# Altium PCB DBG-010.PcbDoc (part 1 of 2)
Units mil, origin at the board's own origin, x right, y up, seen from the top; angles counter-clockwise.
Board outline 2950 x 3200 mil, 4 copper layers (Top Layer, Layer 1, Layer 2, Bottom Layer), stack 61.811 mil thick; 92 components, 108 nets, 611 pads, 149 vias.
Unrouted connection lines stored in the file: 194.
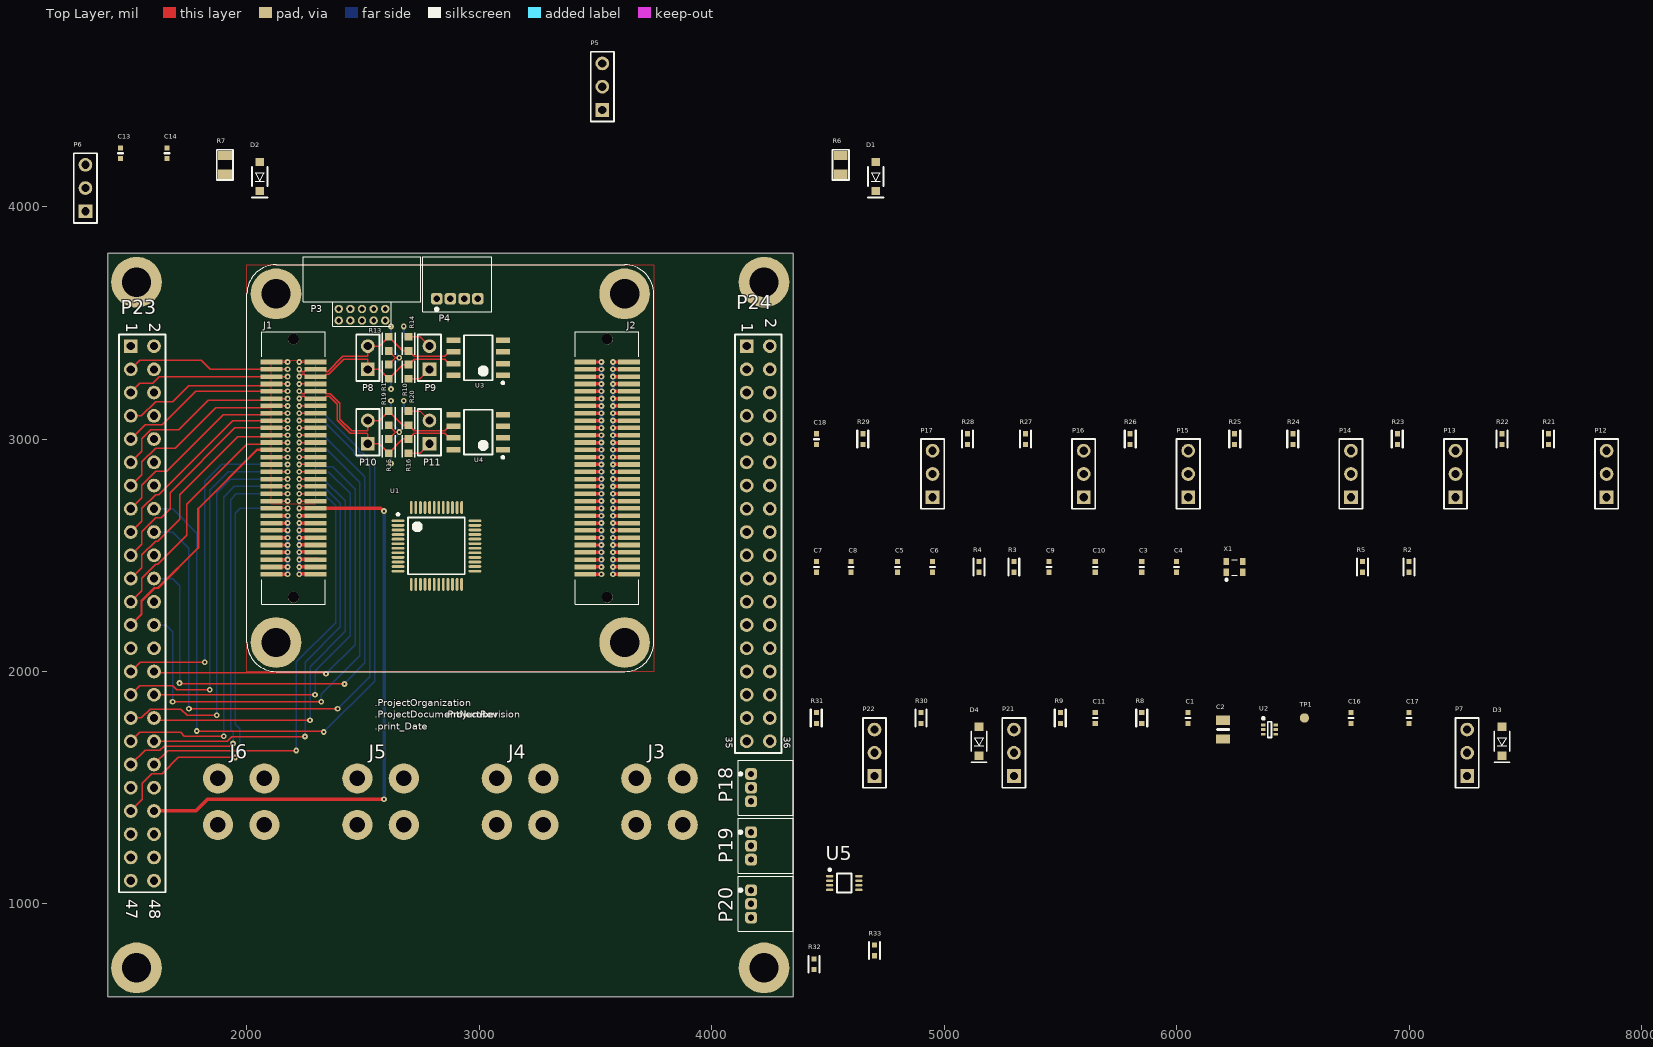
[diagram p0: Top Layer view]
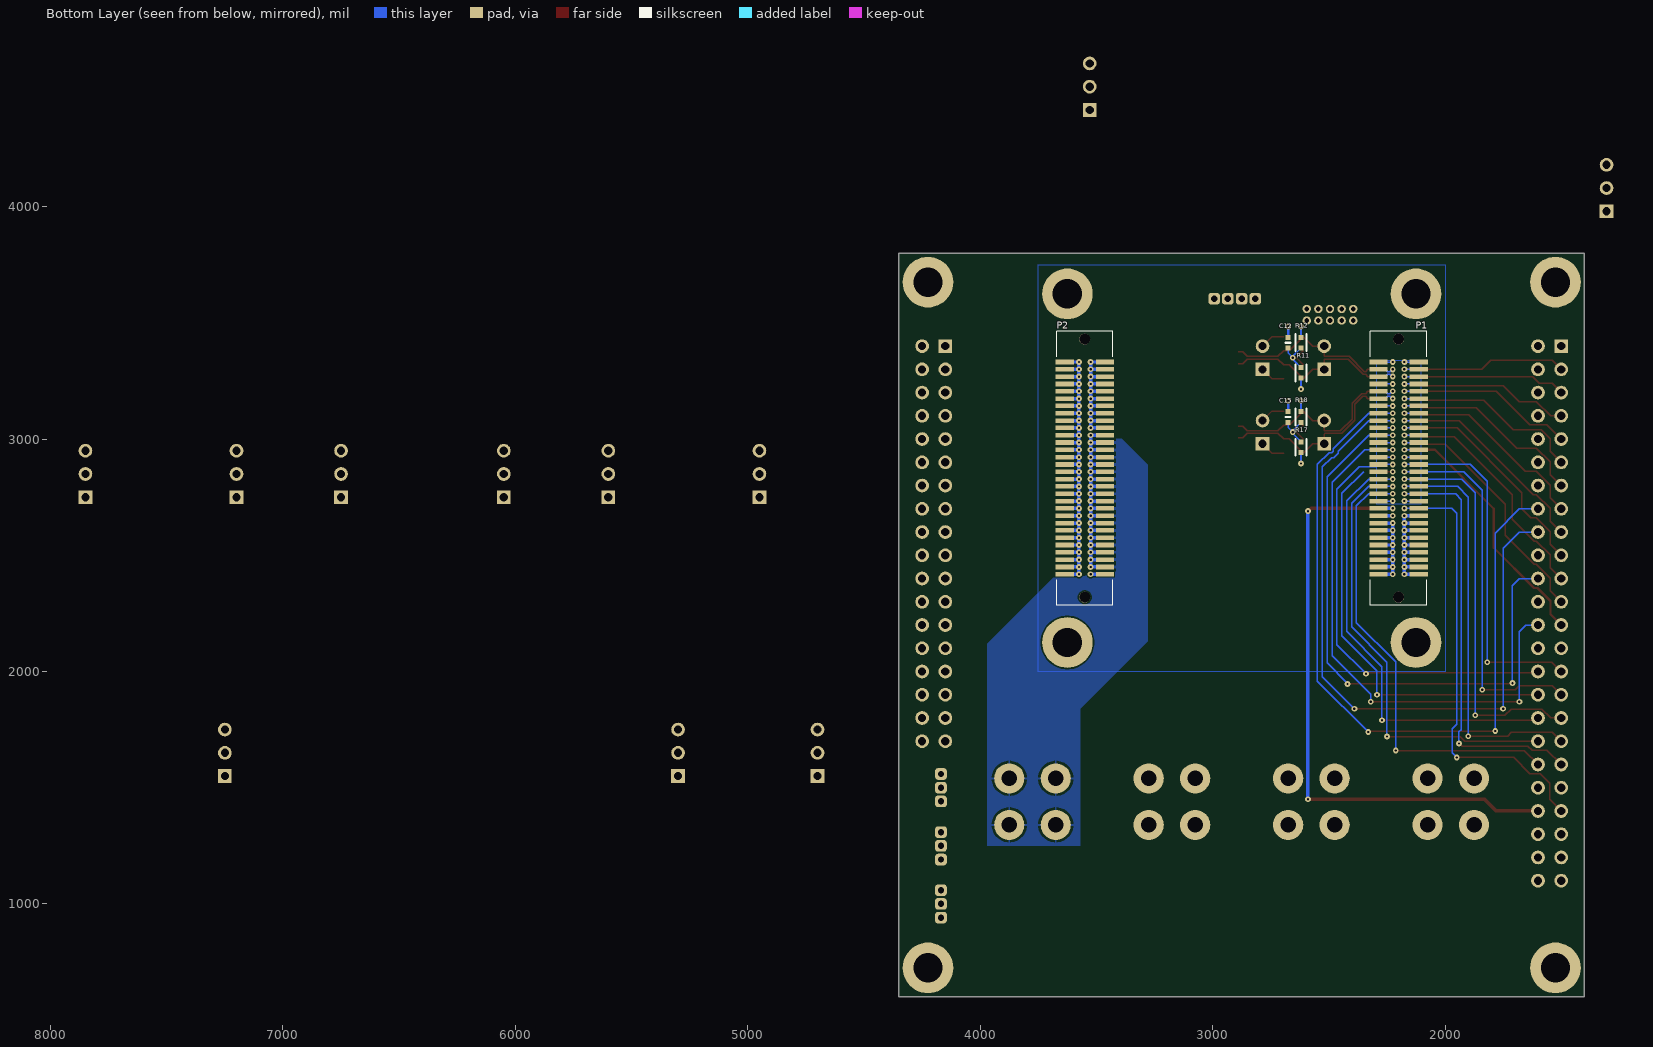
[diagram p1: Bottom Layer view, seen from below]
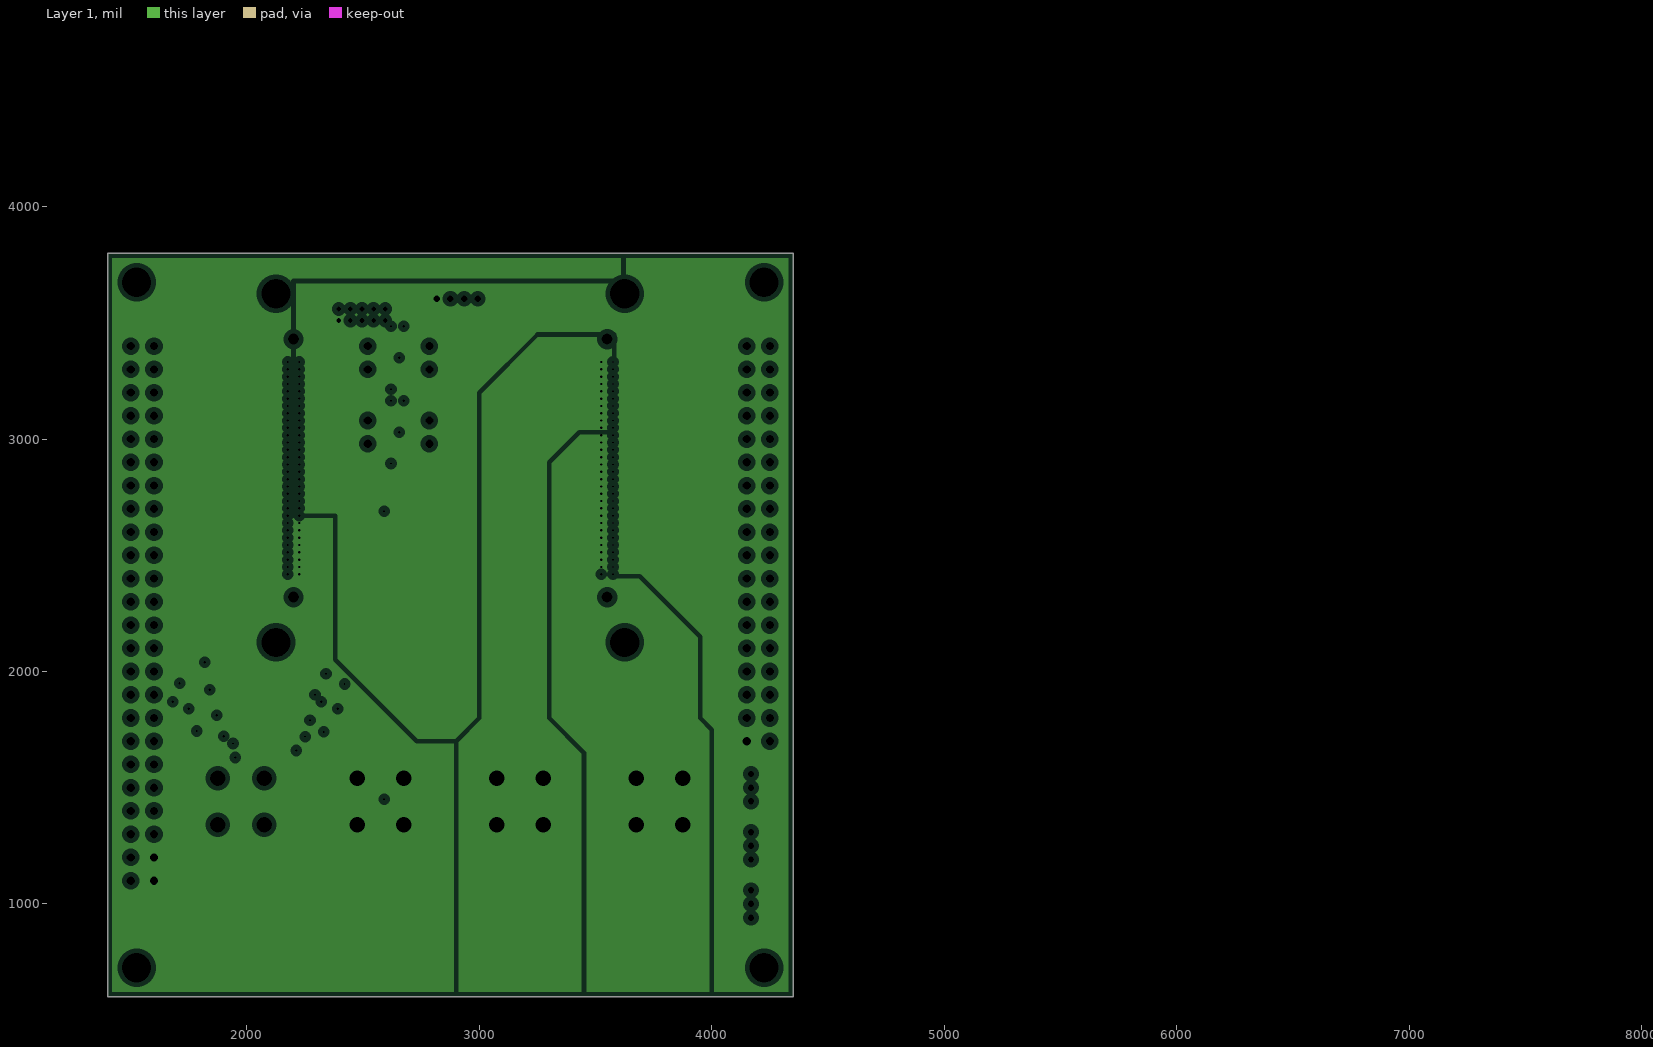
[diagram p2: Layer 1, clearances drawn from the general rule]
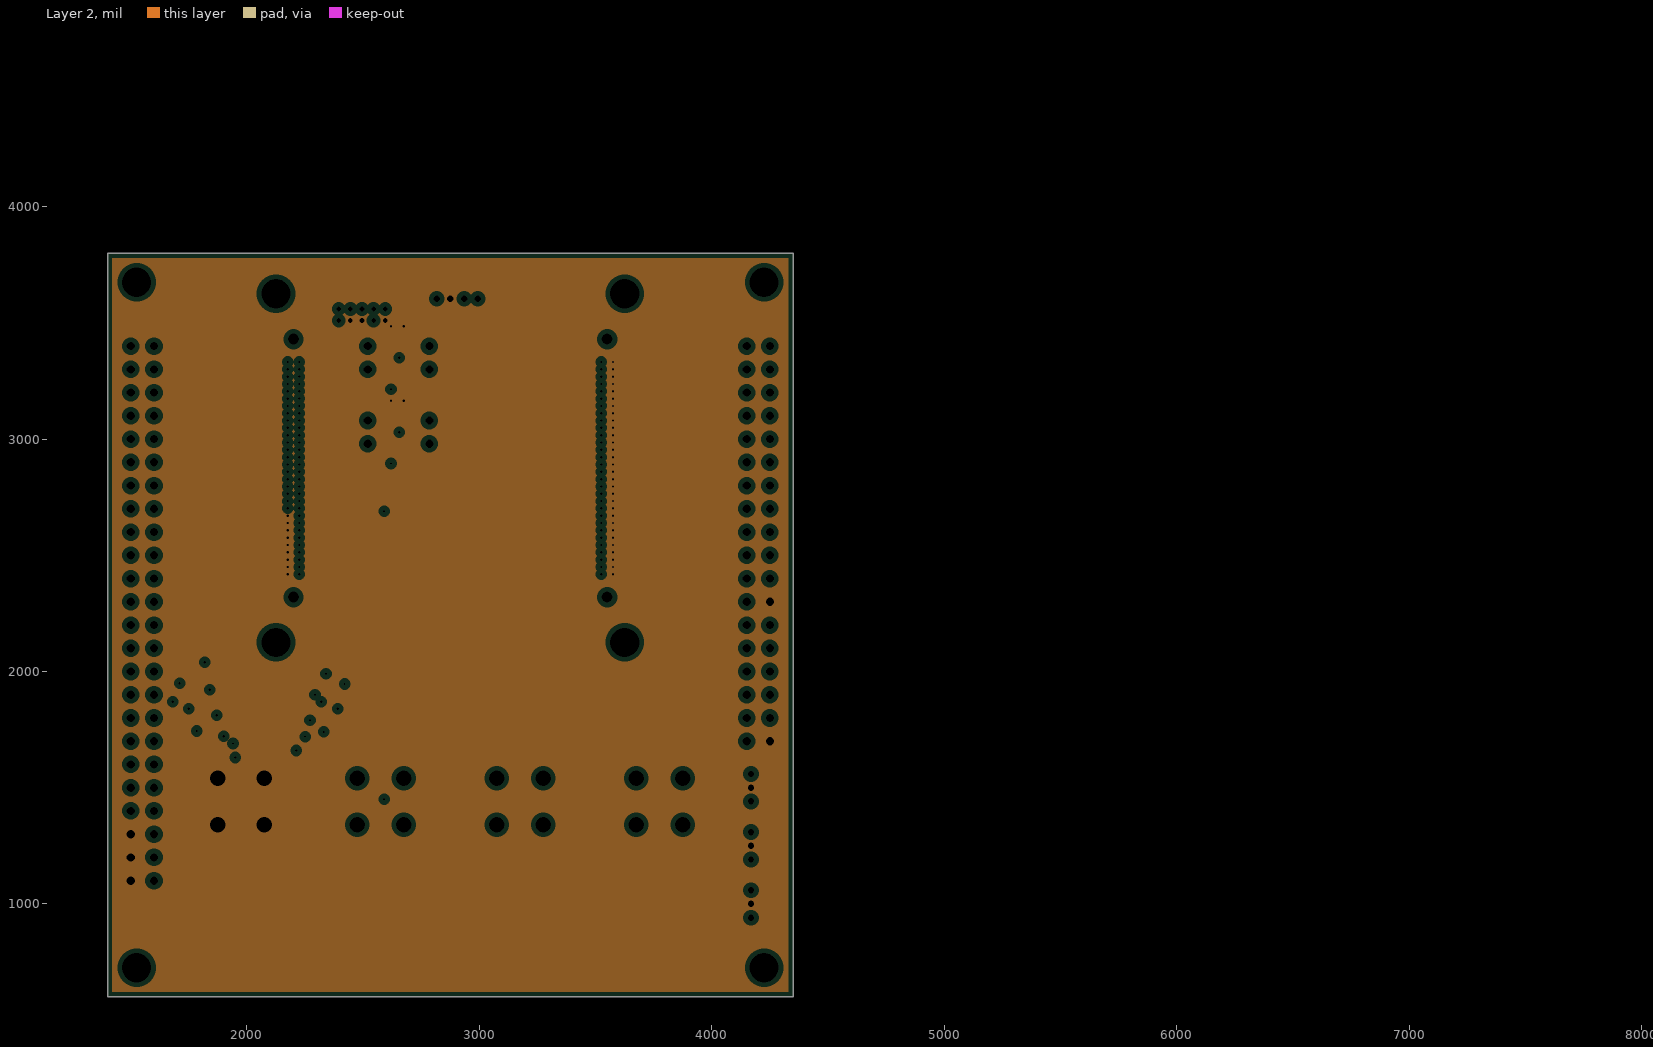
[diagram p3: Layer 2, clearances drawn from the general rule]

## Layer stack, top to bottom
Top Solder: solder mask 0.5, Solder Resist, Dk 3.5
Top Layer: signal copper 1.378
Dielectric 2: prepreg 3.937, PP-006, Dk 4.05
Layer 1: plane copper 0.689
Dielectric 1: core 49.803, FR-4, Dk 4.6
Layer 2: plane copper 0.689, net GND
Dielectric 3: prepreg 3.937, PP-006, Dk 4.05
Bottom Layer: signal copper 1.378
Bottom Solder: solder mask 0.5, Solder Resist, Dk 3.5

## Board outline
1400,600 1400,3800 4350,3800 4350,600

## Design rules (kind name [scope] priority, off if disabled: settings)
AssemblyTestPointUsage AssemblyTestPointUsage_1 [All] p2:
AssemblyTestpoint AssemblyTestpoint_1 [All] p2: testpointundercomponent=TRUE minsize=40 maxsize=100 preferedsize=60 minholesize=0 maxholesize=40 preferedholesize=32 testpointgrid=1 usegrid=TRUE gridtolerance=0.01 allowsidetop=TRUE allowsidebottom=TRUE
Clearance Clearance_1 [All] p1: gap=6 ignorepadtopadclearanceinfootprint=FALSE except(0: Arc-Hole Track-Hole SMDPad-Hole THPad-Hole Via-Hole Fill-Hole Poly-Hole Region-Hole Text-Hole)
DiffPairsRouting [InDifferentialPairClass('CAN')] p1: maxlimit=6 minlimit=6 mostfreqgap=6 toplayer_minwidth=5.5 toplayer_maxwidth=5.5 toplayer_prefwidth=5.5 bottomlayer_minwidth=5.5 bottomlayer_maxwidth=5.5 bottomlayer_prefwidth=5.5 impedanceprofiledriven=TRUE impedanceprofileid={7FDF8D7F-E7BA-4B06-BEF4-E7C1E6577216} impedanceprofilevalue=100.000000 maxuncoupledlength=600
FabricationTestPointUsage FabricationTestPointUsage_1 [All] p2: valid=0 allowmultiple=FALSE
FabricationTestpoint FabricationTestpoint_1 [All] p2: side=3 testpointundercomponent=TRUE minsize=40 maxsize=100 preferedsize=60 minholesize=0 maxholesize=40 preferedholesize=32 testpointgrid=1 allowsidetop=TRUE allowsidebottom=TRUE usegrid=TRUE gridtolerance=0.01
FanoutControl Fanout_LCC [IsLCC] p1: bgadir=Out bgaviamode=Centered fanoutstyle=Auto fanoutdirection=Alternating viagrid=1 // Fanout_LCC (Default Rule)
FanoutControl Fanout_BGA [IsBGA] p2: bgadir=Out bgaviamode=Centered fanoutstyle=Auto fanoutdirection=Alternating viagrid=1 // Fanout_BGA (Default Rule)
FanoutControl Fanout_Default [All] p4: bgadir=Out bgaviamode=Centered fanoutstyle=Auto fanoutdirection=Alternating viagrid=1 // Fanout_Default (Default Rule)
FanoutControl Fanout_Small [(CompPinCount < 5)] p5: bgadir=Out bgaviamode=Centered fanoutstyle=Auto fanoutdirection=OutThenIn viagrid=1 // Fanout_Small (Default Rule)
FanoutControl Fanout_BGA_1 [IsBGA] p6: bgadir=Out bgaviamode=Centered fanoutstyle=Auto fanoutdirection=Alternating viagrid=1 // Fanout_BGA (Default Rule)
FanoutControl Fanout_LCC_1 [IsLCC] p7: bgadir=Out bgaviamode=Centered fanoutstyle=Auto fanoutdirection=Alternating viagrid=1 // Fanout_LCC (Default Rule)
FanoutControl Fanout_SOIC_1 [IsSOIC] p8: bgadir=Out bgaviamode=Centered fanoutstyle=Auto fanoutdirection=Alternating viagrid=1 // Fanout_SOIC (Default Rule)
FanoutControl Fanout_Small_1 [(CompPinCount < 5)] p9: bgadir=Out bgaviamode=Centered fanoutstyle=Auto fanoutdirection=OutThenIn viagrid=1 // Fanout_Small (Default Rule)
FanoutControl Fanout_Default_1 [All] p10: bgadir=Out bgaviamode=Centered fanoutstyle=Auto fanoutdirection=Alternating viagrid=1 // Fanout_Default (Default Rule)
Height Height_Top [TouchesRoom('BoardHeight_Top') and OnTop and not ((Name='J1') or (Name='J2') or (Name='P1') or (Name='P2') )] p1: minheight=0 maxheight=625 prefheight=0
Height Height_Bottom [TouchesRoom('BoardHeight_Bottom') and OnBottom and not ((Name='J1') or (Name='J2') or (Name='P1') or (Name='P2') )] p2: minheight=0 maxheight=152 prefheight=0
HoleSize HoleSize_1 [All] p1: absolutevalues=TRUE maxlimit=130 minlimit=10 maxpercent=80.000 minpercent=20.000
PlaneClearance [All] p1: clearance=20
PlaneConnect [All] p1: pad.planeconnectstyle=Relief pad.reliefexpansion=20 pad.reliefentries=4 pad.reliefconductorwidth=10 pad.reliefairgap=10 via.planeconnectstyle=Direct via.reliefexpansion=20 via.reliefentries=4 via.reliefconductorwidth=10 via.reliefairgap=10
PolygonConnect [All] p1: connectstyle=Relief reliefconductorwidth=10 reliefentries=4 polygonreliefangle="90 Angle" airgapwidth=10
RoomDefinition BoardHeight_Top [False] p1: confinementstyle=ConfineIn formatcopy=TRUE lockcomponents=FALSE outline 3750,3750 2000,3750 2000,2000 3750,2000
RoomDefinition BoardHeight_Bottom [False] p2: confinementstyle=ConfineIn formatcopy=TRUE lockcomponents=FALSE outline 2000,3750 3750,3750 3750,2000 2000,2000
RoutingVias RoutingVias_1 [All] p1: holewidth=10 width=25 viastyle="Through Hole" minholewidth=10 minwidth=25 maxholewidth=28 maxwidth=50
ShortCircuit ShortCircuit_1 [All] p1: allowed=FALSE
SilkToBoardRegionClearance SilkToBoardRegionClearance_1 [All] p2:
SolderMaskExpansion [All] p1: expansion=4 istentingtop=FALSE
UnRoutedNet UnRoutedNet_1 [All] p1:
UnpouredPolygon UnpouredPolygon_1 [All] p1:
Width "Schematic Width Constraint_1" [InNet('NetR3_1')] p1: maxlimit=10 minlimit=10 preferedwidth=10
Width "Schematic Width Constraint" [InNet('XTAL')] p2: maxlimit=10 minlimit=10 preferedwidth=10
Width [All] p3: maxlimit=100 minlimit=5 preferedwidth=10 minimp=50.000000 maximp=50.000000 favimp=50.000000
18 further rules are at their usual default settings.

## Classes and differential pairs
differential pair class CAN: CAN0 CAN1
net class HIghVoltage: +VBAT +VBAT_Preboot
component class Sheet1: J6
differential pair CAN1: +CAN1_P -CAN1_N
differential pair CAN0: +CAN0_P -CAN0_N

## Components (designator, comment, footprint, x,y, rotation, side; value= is the part's Value field where it differs from the comment)
C1 "1µF" SMD-0402C 6050,1800 r0 top
C2 "4.7µF" SMD-0805C 6200,1750 r0 top
C3 "0.10µF" SMD-0402C 5850,2450 r0 top
C4 "0.10µF" SMD-0402C 6000,2450 r0 top
C5 "0.10µF" SMD-0402C 4800,2450 r0 top
C6 "10000pF" SMD-0402C 4950,2450 r0 top
C7 "1µF" SMD-0402C 4450,2450 r0 top
C8 "0.10µF" SMD-0402C 4600,2450 r0 top
C9 "0.10µF" SMD-0402C 5450,2450 r0 top
C10 "0.10µF" SMD-0402C 5650,2450 r0 top
C11 "0.10µF" SMD-0402C 5650,1800 r0 top
C12 "0.10µF" SMD-0402C 2675,3415 r0 bottom
C13 "0.10µF" SMD-0402C 1455,4230 r0 top
C14 "0.10µF" SMD-0402C 1655,4230 r0 top
C15 "0.10µF" SMD-0402C 2675,3095 r0 bottom
C16 "0.10µF" SMD-0402C 6750,1800 r0 top
C17 "0.10µF" SMD-0402C 7000,1800 r0 top
C18 "0.10µF" SMD-0402C 4450,3000 r0 top
D1 "SBR0560S1Q-7" SOD123 4705,4130 r90 top
D2 "SBR0560S1Q-7" SOD123 2055,4130 r90 top
D3 "1N4148WQ-7-F" SOD123 7400,1700 r90 top
D4 "1N4148WQ-7-F" SOD123 5150,1700 r90 top
J1 "10144517-064802LF" 10144517-064802LF 2200,2875 r90 top locked
J2 "10144517-064802LF" 10144517-064802LF 3550,2875 r90 top locked
J3 "CT3151SP-2" CT3151SP-2 3775,1440 r180 top
J4 "CT3151SP-2" CT3151SP-2 3175,1440 r180 top
J5 "CT3151SP-2" CT3151SP-2 2575,1440 r180 top
J6 "CT3151SP-0" CT3151SP-0 1975,1440 r180 top
P1 "10144518-064802LF" 10144518-064802LF 2200,2875 r270 bottom locked
P2 "10144518-064802LF" 10144518-064802LF 3550,2875 r270 bottom locked
P3 "2x5_0.05_SWD" 2x5_0.05_R 2495,3510 r180 top
P4 "S4B-ZR(LF)(SN)" S4B-ZR(LF)(SN) 2905,3785 r180 top
P5 "Header 3" HDR1X3 3528.9,4416.35 r90 top
P6 "Header 3" HDR1X3 1305,3980 r90 top
P7 "Header 3" HDR1X3 7250,1550 r90 top
P8 "Header 2" HDR1X2 2520,3300 r90 top
P9 "Header 2" HDR1X2 2785,3300 r90 top
P10 "Header 2" HDR1X2 2520,2980 r90 top
P11 "Header 2" HDR1X2 2785,2980 r90 top
P12 "Header 3" HDR1X3 7850,2750 r90 top
P13 "Header 3" HDR1X3 7200,2750 r90 top
P14 "Header 3" HDR1X3 6750,2750 r90 top
P15 "Header 3" HDR1X3 6050,2750 r90 top
P16 "Header 3" HDR1X3 5600,2750 r90 top
P17 "Header 3" HDR1X3 4950,2750 r90 top
P18 "S3B-ZR(LF)(SN)" S3B-ZR(LF)(SN) 4350,1500 r90 top
P19 "S3B-ZR(LF)(SN)" S3B-ZR(LF)(SN) 4350,1250 r90 top
P20 "S3B-ZR(LF)(SN)" S3B-ZR(LF)(SN) 4350,1000 r90 top
P21 "Header 3" HDR1X3 5300,1550 r90 top
P22 "Header 3" HDR1X3 4700,1550 r90 top
P23 "Header 24X2" HDR2X24 1500,3400 r270 top
P24 "Header 18X2" HDR2X18 4150,3400 r270 top
R1 "62" SMD-0603-RES 2610,3290 r0 top
R2 "1k" SMD-0402-RES 7000,2450 r0 top
R3 "22" SMD-0402-RES 5300,2450 r0 top
R4 "1k" SMD-0402-RES 5150,2450 r0 top
R5 "10k" SMD-0402-RES 6800,2450 r0 top
R6 "2.2" SMD-0805-RES 4555,4180 r0 top
R7 "2.2" SMD-0805-RES 1905,4180 r0 top
R8 "10k" SMD-0402-RES 5850,1800 r0 top
R9 "100k" SMD-0402-RES 5500,1800 r0 top
R10 "62" SMD-0603-RES 2695,3290 r180 top
R11 "1.5k" SMD-0402-RES 2620,3285 r180 bottom
R12 "1.5k" SMD-0402-RES 2620,3415 r180 bottom
R13 "62" SMD-0603-RES 2610,3410 r0 top
R14 "62" SMD-0603-RES 2695,3410 r180 top
R15 "62" SMD-0603-RES 2610,2970 r0 top
R16 "62" SMD-0603-RES 2695,2970 r180 top
R17 "1.5k" SMD-0402-RES 2620,2965 r180 bottom
R18 "1.5k" SMD-0402-RES 2620,3095 r180 bottom
R19 "62" SMD-0603-RES 2610,3090 r0 top
R20 "62" SMD-0603-RES 2695,3090 r180 top
R21 "1k" SMD-0402-RES 7600,3000 r0 top
R22 "100k" SMD-0402-RES 7400,3000 r0 top
R23 "100k" SMD-0402-RES 6950,3000 r0 top
R24 "1k" SMD-0402-RES 6500,3000 r0 top
R25 "100k" SMD-0402-RES 6250,3000 r0 top
R26 "100k" SMD-0402-RES 5800,3000 r0 top
R27 "1k" SMD-0402-RES 5350,3000 r0 top
R28 "100k" SMD-0402-RES 5100,3000 r0 top
R29 "100k" SMD-0402-RES 4650,3000 r0 top
R30 "100k" SMD-0402-RES 4900,1800 r0 top
R31 "1k" SMD-0402-RES 4450,1800 r0 top
R32 "220" SMD-0402-RES 4440,740 r0 top
R33 "1k" SMD-0402-RES 4700,800 r0 top
TP1 "TP" TP_SMD_40 6550,1800 r90 top
U1 "ATSAMC21G" TSQFP50P900X900X120-48N 2815.35,2540.16 r0 top
U2 "NCV8170AXV330T2G" SOTFL50P160X60-6N 6400,1750 r0 top
U3 "ATA6561-GAQW" SOIC127P600X175-8N 2995,3350 r180 top
U4 "ATA6561-GAQW" SOIC127P600X175-8N 2995,3030 r180 top
U5 "74HC3G14DC-Q100H" "TSSOP50P310X100-8N (74HC3G14DC-Q100H)" 4570,1090 r0 top
X1 "MC2016K30.0000C16ESH" MC2016 6250,2450 r0 top

## Footprints (in the part's own frame and the unit in brackets; to place one, negate y for a bottom-side part, rotate by r counter-clockwise, add the part's x,y. Pads: shape width x height; smd on the part's side, far side on the other; paste and mask are expansions set on the pad)
2x5_0.05_R [mil]
  round 36 hole 20: 1(100,0) 2(100,-50) 3(50,0) 4(50,-50) 5(0,0) 6(0,-50) 8(-50,-50) 9(-100,0) 10(-100,-50)
  round 36 hole 20 mask+4: 7(-50,0)
  silkscreen extent -253,-274 253,25, body extent -250,-274 250,8, height 198
10144517-064802LF [mm]
  rect 0.5x2.4 smd: 1(11.6,2.4) 2(11.6,-2.4) 3(10.8,2.4) 4(10.8,-2.4) 5(10,2.4) 6(10,-2.4) 7(9.2,2.4) 8(9.2,-2.4) 9(8.4,2.4) 10(8.4,-2.4) 11(7.6,2.4) 12(7.6,-2.4) 13(6.8,2.4) 14(6.8,-2.4) 15(6,2.4) 16(6,-2.4) 17(5.2,2.4) 18(5.2,-2.4) 19(4.4,2.4) 20(4.4,-2.4) 21(3.6,2.4) 22(3.6,-2.4) 23(2.8,2.4) 24(2.8,-2.4) 25(2,2.4) 26(2,-2.4) 27(1.2,2.4) 28(1.2,-2.4) 29(0.4,2.4) 30(0.4,-2.4) 31(-0.4,2.4) 32(-0.4,-2.4) 33(-1.2,2.4) 34(-1.2,-2.4) 35(-2,2.4) 36(-2,-2.4) 37(-2.8,2.4) 38(-2.8,-2.4) 39(-3.6,2.4) 40(-3.6,-2.4) 41(-4.4,2.4) 42(-4.4,-2.4) 43(-5.2,2.4) 44(-5.2,-2.4) 45(-6,2.4) 46(-6,-2.4) 47(-6.8,2.4) 48(-6.8,-2.4) 49(-7.6,2.4) 50(-7.6,-2.4) 51(-8.4,2.4) 52(-8.4,-2.4) 53(-9.2,2.4) 54(-9.2,-2.4) 55(-10,2.4) 56(-10,-2.4) 57(-10.8,2.4) 58(-10.8,-2.4) 59(-11.6,2.4) 60(-11.6,-2.4)
  round 1.2 hole 1.2 unplated: M1(14.1,0)
  round 0.8 hole 0.8 unplated: M2(-14.1,0)
  silkscreen extent -14.9,-3.47 14.9,3.47, body extent -14.9,-3.4 14.9,3.4, height 15.65
10144518-064802LF [mm]
  rect 0.5x2 smd: 1(-11.6,2.2) 2(-11.6,-2.2) 3(-10.8,2.2) 4(-10.8,-2.2) 5(-10,2.2) 6(-10,-2.2) 7(-9.2,2.2) 8(-9.2,-2.2) 9(-8.4,2.2) 10(-8.4,-2.2) 11(-7.6,2.2) 12(-7.6,-2.2) 13(-6.8,2.2) 14(-6.8,-2.2) 15(-6,2.2) 16(-6,-2.2) 17(-5.2,2.2) 18(-5.2,-2.2) 19(-4.4,2.2) 20(-4.4,-2.2) 21(-3.6,2.2) 22(-3.6,-2.2) 23(-2.8,2.2) 24(-2.8,-2.2) 25(-2,2.2) 26(-2,-2.2) 27(-1.2,2.2) 28(-1.2,-2.2) 29(-0.4,2.2) 30(-0.4,-2.2) 31(0.4,2.2) 32(0.4,-2.2) 33(1.2,2.2) 34(1.2,-2.2) 35(2,2.2) 36(2,-2.2) 37(2.8,2.2) 38(2.8,-2.2) 39(3.6,2.2) 40(3.6,-2.2) 41(4.4,2.2) 42(4.4,-2.2) 43(5.2,2.2) 44(5.2,-2.2) 45(6,2.2) 46(6,-2.2) 47(6.8,2.2) 48(6.8,-2.2) 49(7.6,2.2) 50(7.6,-2.2) 51(8.4,2.2) 52(8.4,-2.2) 53(9.2,2.2) 54(9.2,-2.2) 55(10,2.2) 56(10,-2.2) 57(10.8,2.2) 58(10.8,-2.2) 59(11.6,2.2) 60(11.6,-2.2)
  round 1.2 hole 1.2 unplated: M2(14.1,0)
  silkscreen extent -14.97,-3.08 14.97,3.08, body extent -14.9,-3 14.9,3, height 7.65
CT3151SP-0 [mil]
  round 130 hole 66: 1(-100,100) 1(-100,-100) 1(100,100) 1(100,-100)
  body extent -266,-128 266,962, height 566
CT3151SP-2 [mil]
  round 130 hole 66: 1(-100,100) 1(-100,-100) 1(100,100) 1(100,-100)
  body extent -266,-128 266,962, height 566
HDR1X2 [mm] "Connector; Header; 2 Position"
  rect 1.5x1.5 hole 0.9: 1(0,0)
  round 1.5 hole 0.9: 2(2.54,0)
  silkscreen extent -1.27,-1.27 3.81,1.27
HDR1X3 [mm] "Connector; Header; 3 Position"
  rect 1.5x1.5 hole 0.9: 1(0,0)
  round 1.5 hole 0.9: 2(2.54,0) 3(5.08,0)
  silkscreen extent -1.27,-1.27 6.35,1.27
HDR2X18 [mm] "Connector; Header; 18x2 Position"
  rect 1.5x1.5 hole 0.9: 1(0,0)
  round 1.5 hole 0.9: 2(0,2.54) 3(2.54,0) 4(2.54,2.54) 5(5.08,0) 6(5.08,2.54) 7(7.62,0) 8(7.62,2.54) 9(10.16,0) 10(10.16,2.54) 11(12.7,0) 12(12.7,2.54) 13(15.24,0) 14(15.24,2.54) 15(17.78,0) 16(17.78,2.54) 17(20.32,0) 18(20.32,2.54) 19(22.86,0) 20(22.86,2.54) 21(25.4,0) 22(25.4,2.54) 23(27.94,0) 24(27.94,2.54) 25(30.48,0) 26(30.48,2.54) 27(33.02,0) 28(33.02,2.54) 29(35.56,0) 30(35.56,2.54) 31(38.1,0) 32(38.1,2.54) 33(40.64,0) 34(40.64,2.54) 35(43.18,0) 36(43.18,2.54)
  silkscreen extent -1.27,-1.27 44.45,3.81
HDR2X24 [mm] "Connector; Header; 24x2 Position"
  rect 1.5x1.5 hole 0.9: 1(0,0)
  round 1.5 hole 0.9: 2(0,2.54) 3(2.54,0) 4(2.54,2.54) 5(5.08,0) 6(5.08,2.54) 7(7.62,0) 8(7.62,2.54) 9(10.16,0) 10(10.16,2.54) 11(12.7,0) 12(12.7,2.54) 13(15.24,0) 14(15.24,2.54) 15(17.78,0) 16(17.78,2.54) 17(20.32,0) 18(20.32,2.54) 19(22.86,0) 20(22.86,2.54) 21(25.4,0) 22(25.4,2.54) 23(27.94,0) 24(27.94,2.54) 25(30.48,0) 26(30.48,2.54) 27(33.02,0) 28(33.02,2.54) 29(35.56,0) 30(35.56,2.54) 31(38.1,0) 32(38.1,2.54) 33(40.64,0) 34(40.64,2.54) 35(43.18,0) 36(43.18,2.54) 37(45.72,0) 38(45.72,2.54) 39(48.26,0) 40(48.26,2.54) 41(50.8,0) 42(50.8,2.54) 43(53.34,0) 44(53.34,2.54) 45(55.88,0) 46(55.88,2.54) 47(58.42,0) 48(58.42,2.54)
  silkscreen extent -1.27,-1.27 59.69,3.81
MC2016 [mm]
  rect 0.6x0.8 smd: 1(-0.9,-0.6) 2(0.9,-0.6) 3(0.9,0.6) 4(-0.9,0.6)
  silkscreen extent -1,-1.5 0.3,0.8, body extent -1,-0.8 1,0.8, height 0.4
S3B-ZR(LF)(SN) [mm]
  rrect50% 1.27x1.27 hole 0.7: 1(1.5,4.6) 2(0,4.6) 3(-1.5,4.6)
  silkscreen extent -3,0 3,6, body extent -3,0 3,6, height 3.7
S4B-ZR(LF)(SN) [mm]
  rrect50% 1.27x1.27 hole 0.7: 1(2.25,4.6) 2(0.75,4.6) 3(-0.75,4.6) 4(-2.25,4.6)
  silkscreen extent -3.75,0 3.75,6, body extent -3.75,0 3.75,6, height 3.7
SMD-0402-RES [mm]
  rect 0.55x0.55 smd: 1(0,0.584) 2(0,-0.584)
  silkscreen extent -0.6,-0.9 0.6,0.9, body extent -0.28,-0.57 0.27,0.58, height 0.41
SMD-0402C [mm]
  rect 0.55x0.55 smd: 1(0,0.584) 2(0,-0.584)
  silkscreen extent -0.25,0 0.25,0, body extent -0.25,-0.51 0.25,0.51, height 0.51
SMD-0603-RES [mm]
  rect 0.85x0.85 smd: 1(0,0.775) 2(0,-0.775)
  silkscreen extent -0.7,-1.2 0.7,1.2, body extent -0.4,-0.85 0.4,0.85, height 0.56
SMD-0805-RES [mil]
  rect 60x40 smd: 1(0,40) 2(0,-40)
  silkscreen extent -35,-65 35,65, body extent -24,-39 26,39, height 31
SMD-0805C [mil]
  rect 60x40 smd: 1(0,40) 2(0,-40)
  silkscreen extent -25,0 25,0, body extent -25,-39 25,39, height 35
SOD123 [mm] "SOD123 2-Leads, Body 1.55x2.70mm, Pitch 0.50mm, IPC Medium Density"
  rect 0.9x0.95 smd: A(1.575,0) K(-1.575,0)
  silkscreen extent -2.3,-0.85 1.05,0.85, body extent -1.85,-0.85 1.85,0.85, height 1.45
SOIC127P600X175-8N [mm] "SOIC, 8-Leads, Body 4.90x3.90mm, Pitch 1.27mm, IPC Medium Density"
  rect 1.55x0.6 smd: 1(-2.7,1.905) 2(-2.7,0.635) 3(-2.7,-0.635) 4(-2.7,-1.905) 5(2.7,-1.905) 6(2.7,-0.635) 7(2.7,0.635) 8(2.7,1.905)
  silkscreen extent -2.83,-2.45 1.55,2.88, body extent -3,-2.45 3,2.45, height 1.75
SOTFL50P160X60-6N [mm] "SOTFL, 6-Leads, Body 1.60x1.60mm, Pitch 0.50mm, IPC Medium Density"
  rect 0.5x0.3 smd mask+0.051: 1(-0.675,0.5) 2(-0.675,0) 3(-0.675,-0.5) 4(0.675,-0.5) 5(0.675,0) 6(0.675,0.5)
  silkscreen extent -0.8,-0.85 0.2,1.35, body extent -0.8,-0.85 0.8,0.85, height 0.6
TP_SMD_40 [mil]
  round 40 smd: 1(0,0)
TSQFP50P900X900X120-48N [mm] "TSQFP, 48-Leads, Body 7.00x7.00mm, Pitch 0.50mm, IPC Medium Density"
  oval 1.4x0.3 smd: 1(-4.2,2.75) 2(-4.2,2.25) 3(-4.2,1.75) 4(-4.2,1.25) 5(-4.2,0.75) 6(-4.2,0.25) 7(-4.2,-0.25) 8(-4.2,-0.75) 9(-4.2,-1.25) 10(-4.2,-1.75) 11(-4.2,-2.25) 12(-4.2,-2.75) 25(4.2,-2.75) 26(4.2,-2.25) 27(4.2,-1.75) 28(4.2,-1.25) 29(4.2,-0.75) 30(4.2,-0.25) 31(4.2,0.25) 32(4.2,0.75) 33(4.2,1.25) 34(4.2,1.75) 35(4.2,2.25) 36(4.2,2.75)
  oval 0.3x1.4 smd: 13(-2.75,-4.2) 14(-2.25,-4.2) 15(-1.75,-4.2) 16(-1.25,-4.2) 17(-0.75,-4.2) 18(-0.25,-4.2) 19(0.25,-4.2) 20(0.75,-4.2) 21(1.25,-4.2) 22(1.75,-4.2) 23(2.25,-4.2) 24(2.75,-4.2) 37(2.75,4.2) 38(2.25,4.2) 39(1.75,4.2) 40(1.25,4.2) 41(0.75,4.2) 42(0.25,4.2) 43(-0.25,4.2) 44(-0.75,4.2) 45(-1.25,4.2) 46(-1.75,4.2) 47(-2.25,4.2) 48(-2.75,4.2)
  silkscreen extent -4.32,-3.1 3.1,3.57, body extent -4.5,-4.5 4.5,4.5, height 1.2
"TSSOP50P310X100-8N (74HC3G14DC-Q100H)" [mm] "TSSOP, 8-Leads, Body 2.00x2.30mm, Pitch 0.50mm, IPC Medium Density"
  oval 0.8x0.3 smd: 1(-1.6,0.75) 2(-1.6,0.25) 3(-1.6,-0.25) 4(-1.6,-0.75) 5(1.6,-0.75) 6(1.6,-0.25) 7(1.6,0.25) 8(1.6,0.75)
  silkscreen extent -1.72,-1.05 0.8,1.57, body extent -1.55,-1.05 1.55,1.05, height 1

## Part data
C1 C7: library part GCM155C71A105KE38D, "CAP CER 1UF 10V X7S 0402", Digi-Key Part Number=490-13409-1-ND, Manufacturer="Murata Electronics North America", Operating Temperature="-55°C ~ 125°C", Package / Case="0402 (1005 Metric)", Ratings=AEC-Q200, Temperature Coefficient=X7S, Tolerance=±10%, Voltage=10V, @ qty=0, Applications=Automotive, Datasheets=http://www.murata.com/~/media/webrenewal/support/library/catalog/products/capacitor/mlcc/c03e.ashx, Factory Stock=0, Features=-, Height - Seated (Max)=-, Image=//media.digikey.com/Renders/Murata%20Renders/ZRB-SERIES-0402.jpg, Lead Spacing=-, Lead Style=-, Minimum Quantity=1, Mounting Type="Surface Mount, MLCC", Packaging="Cut Tape (CT)", Part Number=GCM155C71A105KE38D, Part Status=Active, Quantity Available=7240, Series=GCM, Size / Dimension="0.039\" L x 0.020\" W (1.00mm x 0.50mm)", Thickness (Max)="0.022\" (0.55mm)", Unit Price (USD)=0.12
C2: library part GCJ21BR71C475KA01L, "CAP CER 4.7UF 16V X7R 0805", Digi-Key Part Number=490-10557-1-ND, Manufacturer="Murata Electronics North America", Operating Temperature="-55°C ~ 125°C", Package / Case="0805 (2012 Metric)", Ratings=AEC-Q200, Temperature Coefficient=X7R, Tolerance=±10%, Voltage=16V, @ qty=0, Applications="Automotive, Boardflex Sensitive", Datasheets=http://www.murata.com/~/media/webrenewal/support/library/catalog/products/capacitor/mlcc/c03e.ashx, Factory Stock=0, Features="Soft Termination", Height - Seated (Max)=-, Image=//media.digikey.com/Renders/Murata%20Renders/0805%20(2012%20Metric)%20.85mm.jpg, Lead Spacing=-, Lead Style=-, Minimum Quantity=1, Mounting Type="Surface Mount, MLCC", Packaging="Cut Tape (CT)", Part Number=GCJ21BR71C475KA01L, Part Status=Active, Quantity Available=53217, Series=GCJ, Size / Dimension="0.079\" L x 0.049\" W (2.00mm x 1.25mm)", Thickness (Max)="0.057\" (1.45mm)", Unit Price (USD)=0.44
C3 C4 C5 C8 C9 C10 C11 C12 C13 C14 C15 C16 C17 C18: library part GCM155R71C104KA55D, "CAP CER 0.1UF 16V X7R 0402", Digi-Key Part Number=490-4759-1-ND, Manufacturer="Murata Electronics North America", Operating Temperature="-55°C ~ 125°C", Package / Case="0402 (1005 Metric)", Ratings=AEC-Q200, Temperature Coefficient=X7R, Tolerance=±10%, Voltage=16V, @ qty=0, Applications=Automotive, Datasheets=http://www.murata.com/~/media/webrenewal/support/library/catalog/products/capacitor/mlcc/c03e.ashx, Factory Stock=0, Features=-, Height - Seated (Max)=-, Image=//media.digikey.com/Renders/Murata%20Renders/ZRB-SERIES-0402.jpg, Lead Spacing=-, Lead Style=-, Minimum Quantity=1, Mounting Type="Surface Mount, MLCC", Packaging="Cut Tape (CT)", Part Number=GCM155R71C104KA55D, Part Status=Active, Quantity Available=734194, Series=GCM, Size / Dimension="0.039\" L x 0.020\" W (1.00mm x 0.50mm)", Thickness (Max)="0.022\" (0.55mm)", Unit Price (USD)=0.1
C6: library part GCM155R71E103KA37D, "CAP CER 10000PF 25V X7R 0402", Digi-Key Part Number=490-6043-1-ND, Manufacturer="Murata Electronics North America", Operating Temperature="-55°C ~ 125°C", Package / Case="0402 (1005 Metric)", Ratings=AEC-Q200, Temperature Coefficient=X7R, Tolerance=±10%, Voltage=25V, @ qty=0, Applications=Automotive, Datasheets=http://www.murata.com/~/media/webrenewal/support/library/catalog/products/capacitor/mlcc/c03e.ashx, Factory Stock=0, Features=-, Height - Seated (Max)=-, Image=//media.digikey.com/Renders/Murata%20Renders/ZRB-SERIES-0402.jpg, Lead Spacing=-, Lead Style=-, Minimum Quantity=1, Mounting Type="Surface Mount, MLCC", Packaging="Cut Tape (CT)", Part Number=GCM155R71E103KA37D, Part Status=Active, Quantity Available=128782, Series=GCM, Size / Dimension="0.039\" L x 0.020\" W (1.00mm x 0.50mm)", Thickness (Max)="0.022\" (0.55mm)", Unit Price (USD)=0.1
P5 P6 P7 P12 P13 P14 P15 P16 P17 P21 P22: "Header, 3-Pin", LatestRevisionDate=17-Jul-2002, LatestRevisionNote="Re-released for DXP Platform.", Publisher="Altium Limited"
P8 P9 P10 P11: "Header, 2-Pin", LatestRevisionDate=17-Jul-2002, LatestRevisionNote="Re-released for DXP Platform.", Publisher="Altium Limited"
P23: "Header, 24-Pin, Dual row", LatestRevisionDate=17-Jul-2002, LatestRevisionNote="Re-released for DXP Platform.", Publisher="Altium Limited"
P24: "Header, 18-Pin, Dual row", LatestRevisionDate=17-Jul-2002, LatestRevisionNote="Re-released for DXP Platform.", Publisher="Altium Limited"
R1 R10 R13 R14 R15 R16 R19 R20: library part ERJ-PA3J620V, "RES SMD 62 OHM 5% 1/4W 0603", Digi-Key Part Number=P62.00BZCT-ND, Manufacturer="Panasonic Electronic Components", Operating Temperature="-55°C ~ 155°C", Package / Case="0603 (1608 Metric)", Power (Watts)="0.25W, 1/4W", Supplier Device Package=0603, Temperature Coefficient=±200ppm/°C, Tolerance=±5%, @ qty=1500, Composition="Thick Film", Datasheets=https://industrial.panasonic.com/cdbs/www-data/pdf/RDA0000/AOA0000C243.pdf, Factory Stock=0, Failure Rate=-, Features="Automotive AEC-Q200, Pulse Withstanding", Height - Seated (Max)="0.022\" (0.55mm)", Image=//media.digikey.com/Photos/Panasonic%20Photos/MFG_ERJ-P6W%20Series.jpg, Minimum Quantity=1, Number of Terminations=2, Packaging="Cut Tape (CT)", Part Number=ERJ-PA3J620V, Part Status=Active, Quantity Available=2726, Series=ERJ, Size / Dimension="0.063\" L x 0.031\" W (1.60mm x 0.80mm)", Unit Price (USD)=0.01646
R2 R4 R21 R24 R27 R31 R33: library part ERJ-2GEJ102X, "RES SMD 1K OHM 5% 1/10W 0402", Digi-Key Part Number=P1.0KJCT-ND, Manufacturer="Panasonic Electronic Components", Operating Temperature="-55°C ~ 155°C", Package / Case="0402 (1005 Metric)", Power (Watts)="0.1W, 1/10W", Supplier Device Package=0402, Temperature Coefficient=±200ppm/°C, Tolerance=±5%, @ qty=1500, Composition="Thick Film", Datasheets=http://industrial.panasonic.com/www-cgi/jvcr13pz.cgi?E+PZ+3+AOA0001+ERJ2GEJ102X+7+WW, Factory Stock=0, Failure Rate=-, Features="Automotive AEC-Q200", Height - Seated (Max)="0.016\" (0.40mm)", Image=//media.digikey.com/Photos/Panasonic%20Photos/ERJ-PA2-Series.jpg, Minimum Quantity=1, Number of Terminations=2, Packaging="Cut Tape (CT)", Part Number=ERJ-2GEJ102X, Part Status=Active, Quantity Available=1939857, Series=ERJ, Size / Dimension="0.039\" L x 0.020\" W (1.00mm x 0.50mm)", Unit Price (USD)=0.00350
R3: library part ERJ-2RKF22R0X, "RES SMD 22 OHM 1% 1/10W 0402", Digi-Key Part Number=P22.0LCT-ND, Manufacturer="Panasonic Electronic Components", Operating Temperature="-55°C ~ 155°C", Package / Case="0402 (1005 Metric)", Power (Watts)="0.1W, 1/10W", Supplier Device Package=0402, Temperature Coefficient=±100ppm/°C, Tolerance=±1%, @ qty=1500, Composition="Thick Film", Datasheets=http://industrial.panasonic.com/www-cgi/jvcr13pz.cgi?E+PZ+3+AOA0002+ERJ2RKF22R0X+7+WW, Factory Stock=0, Failure Rate=-, Features="Automotive AEC-Q200", Height - Seated (Max)="0.016\" (0.40mm)", Image=//media.digikey.com/Photos/Panasonic%20Photos/ERJ-PA2-Series.jpg, Minimum Quantity=1, Number of Terminations=2, Packaging="Cut Tape (CT)", Part Number=ERJ-2RKF22R0X, Part Status=Active, Quantity Available=620432, Series=ERJ, Size / Dimension="0.039\" L x 0.020\" W (1.00mm x 0.50mm)", Unit Price (USD)=0.00496
R5 R8: library part ERJ-2GEJ103X, "RES SMD 10K OHM 5% 1/10W 0402", Digi-Key Part Number=P10KJCT-ND, Manufacturer="Panasonic Electronic Components", Operating Temperature="-55°C ~ 155°C", Package / Case="0402 (1005 Metric)", Power (Watts)="0.1W, 1/10W", Supplier Device Package=0402, Temperature Coefficient=±200ppm/°C, Tolerance=±5%, @ qty=1500, Composition="Thick Film", Datasheets=http://industrial.panasonic.com/www-cgi/jvcr13pz.cgi?E+PZ+3+AOA0001+ERJ2GEJ103X+7+WW, Factory Stock=0, Failure Rate=-, Features="Automotive AEC-Q200", Height - Seated (Max)="0.016\" (0.40mm)", Image=//media.digikey.com/Photos/Panasonic%20Photos/ERJ-PA2-Series.jpg, Minimum Quantity=1, Number of Terminations=2, Packaging="Cut Tape (CT)", Part Number=ERJ-2GEJ103X, Part Status=Active, Quantity Available=2560215, Series=ERJ, Size / Dimension="0.039\" L x 0.020\" W (1.00mm x 0.50mm)", Unit Price (USD)=0.00350
R6 R7: library part ERJ-6GEYJ2R2V, "RES SMD 2.2 OHM 5% 1/8W 0805", Digi-Key Part Number=P2.2ACT-ND, Manufacturer="Panasonic Electronic Components", Operating Temperature="-55°C ~ 155°C", Package / Case="0805 (2012 Metric)", Power (Watts)="0.125W, 1/8W", Supplier Device Package=0805, Temperature Coefficient="-100/ +600ppm/°C", Tolerance=±5%, @ qty=1500, Composition="Thick Film", Datasheets=http://industrial.panasonic.com/www-cgi/jvcr13pz.cgi?E+PZ+3+AOA0001+ERJ6GEYJ2R2V+7+WW, Factory Stock=0, Failure Rate=-, Features="Automotive AEC-Q200", Height - Seated (Max)="0.028\" (0.70mm)", Image=//media.digikey.com/Renders/Panasonic%20Renders/ERJ-0805%20Pkg.jpg, Minimum Quantity=1, Number of Terminations=2, Packaging="Cut Tape (CT)", Part Number=ERJ-6GEYJ2R2V, Part Status=Active, Quantity Available=74294, Series=ERJ, Size / Dimension="0.079\" L x 0.049\" W (2.00mm x 1.25mm)", Unit Price (USD)=0.00496
R9 R22 R23 R25 R26 R28 R29 R30: library part ERJ-2GEJ104X, "RES SMD 100K OHM 5% 1/10W 0402", Digi-Key Part Number=P100KJCT-ND, Manufacturer="Panasonic Electronic Components", Operating Temperature="-55°C ~ 155°C", Package / Case="0402 (1005 Metric)", Power (Watts)="0.1W, 1/10W", Supplier Device Package=0402, Temperature Coefficient=±200ppm/°C, Tolerance=±5%, @ qty=1500, Composition="Thick Film", Datasheets=http://industrial.panasonic.com/www-cgi/jvcr13pz.cgi?E+PZ+3+AOA0001+ERJ2GEJ104X+7+WW, Factory Stock=0, Failure Rate=-, Features="Automotive AEC-Q200", Height - Seated (Max)="0.016\" (0.40mm)", Image=//media.digikey.com/Photos/Panasonic%20Photos/ERJ-PA2-Series.jpg, Minimum Quantity=1, Number of Terminations=2, Packaging="Cut Tape (CT)", Part Number=ERJ-2GEJ104X, Part Status=Active, Quantity Available=2387986, Series=ERJ, Size / Dimension="0.039\" L x 0.020\" W (1.00mm x 0.50mm)", Unit Price (USD)=0.00350
R11 R12 R17 R18: library part ERJ-2RKF1501X, "RES SMD 1.5K OHM 1% 1/10W 0402", Digi-Key Part Number=P1.50KLCT-ND, Manufacturer="Panasonic Electronic Components", Operating Temperature="-55°C ~ 155°C", Package / Case="0402 (1005 Metric)", Power (Watts)="0.1W, 1/10W", Supplier Device Package=0402, Temperature Coefficient=±100ppm/°C, Tolerance=±1%, @ qty=1500, Composition="Thick Film", Datasheets=http://industrial.panasonic.com/www-cgi/jvcr13pz.cgi?E+PZ+3+AOA0002+ERJ2RKF1501X+7+WW, Factory Stock=0, Failure Rate=-, Features="Automotive AEC-Q200", Height - Seated (Max)="0.016\" (0.40mm)", Image=//media.digikey.com/Photos/Panasonic%20Photos/ERJ-PA2-Series.jpg, Minimum Quantity=1, Number of Terminations=2, Packaging="Cut Tape (CT)", Part Number=ERJ-2RKF1501X, Part Status=Active, Quantity Available=462851, Series=ERJ, Size / Dimension="0.039\" L x 0.020\" W (1.00mm x 0.50mm)", Unit Price (USD)=0.00496
R32: library part ERJ-2GEJ221X, "RES SMD 220 OHM 5% 1/10W 0402", Digi-Key Part Number=P220JCT-ND, Manufacturer="Panasonic Electronic Components", Operating Temperature="-55°C ~ 155°C", Package / Case="0402 (1005 Metric)", Power (Watts)="0.1W, 1/10W", Supplier Device Package=0402, Temperature Coefficient=±200ppm/°C, Tolerance=±5%, @ qty=1500, Composition="Thick Film", Datasheets=http://industrial.panasonic.com/www-cgi/jvcr13pz.cgi?E+PZ+3+AOA0001+ERJ2GEJ221X+7+WW, Factory Stock=0, Failure Rate=-, Features="Automotive AEC-Q200", Height - Seated (Max)="0.016\" (0.40mm)", Image=//media.digikey.com/Photos/Panasonic%20Photos/ERJ-PA2-Series.jpg, Minimum Quantity=1, Number of Terminations=2, Packaging="Cut Tape (CT)", Part Number=ERJ-2GEJ221X, Part Status=Active, Quantity Available=702646, Series=ERJ, Size / Dimension="0.039\" L x 0.020\" W (1.00mm x 0.50mm)", Unit Price (USD)=0.00350
D1 D2: Unit Price (USD)=0.37
D3 D4: Unit Price (USD)=0.19
J1 J2: Unit Price (USD)=1.95
J3 J4 J5 J6: Unit Price (USD)=2.05
P1 P2: Unit Price (USD)=1.52
P18 P19 P20: Unit Price (USD)=0.20
U5: Unit Price (USD)=0.66

## Free pads (board coordinates)
  round 218 hole 125.98: 0(1525,725) 0(1525,3675) 0(2125,2125) 0(2125,3625) 0(3625,2125) 0(3625,3625) 0(4225,725) 0(4225,3675)

## Via types
v1: diameter 25, hole 10, Top Layer to Bottom Layer, tented both sides, 120 vias
v2: diameter 25, hole 10, Top Layer to Bottom Layer, 29 vias

## Nets (pads, with @x,y where several pads share a name; then routed paths per layer and width w, separated by ;. In a path a pad name is that pad's centre, name@x,y a point inside that pad or via, vN(x,y) a via of type N, cw(c..) or ccw(c..) an arc to the next point about the centre after c; other vN are vias at no path point)
+0.9V_REF: J1.42 P1.42 P23.42 | length 2682.2
  Top Layer w15: P23.42 1780,1400 1830,1450 v2(2590,1450) ; v1(2225,2701.77) J1.42 2575.52,2701.77 2587.29,2690 v2(2590,2690)
  Bottom Layer w15: v1(2225,2701.77) P1.42 ; v2(2590,1450) v2(2590,2690)
+3.3V: C2.2 C3.2 C4.2 C5.2 C6.2 C9.2 C10.2 C14.1 C17.1 D3.A P3.1 P4.1 P21.1 P24.35 R2.2 R4.2 R5.2 TP1.1 U1.6 U1.17 U1.36 U1.44 U2.3 U3.5 U4.5 X1.4
+5V: C1.2 C13.1 C16.1 D3.K J1.46 J1.48 J1.50 J1.52 J1.54 J1.56 J1.58 J1.60 J5.1 P1.46 P1.48 P1.50 P1.52 P1.54 P1.56 P1.58 P1.60 P5.1 P6.1 P7.3 P23.46 P23.48 R11.2 R17.2 U2.1 U3.3 U4.3 | length 1363.3
  Top Layer w15: v1(2225,2575.79) J1.50 ; v1(2225,2607.28) J1.48 ; v1(2225,2638.78) J1.46 ; v1@2235.51,2420 J1.60@2305,2420 ; v1@2235.51,2451.5 J1.58@2305,2451.5 ; v1@2235.51,2482.99 J1.56@2305,2482.99 ; v1@2235.51,2514.49 J1.54@2305,2514.49 ; v1@2235.51,2545.98 J1.52@2305,2545.98
  Bottom Layer w10: v2(2620,2895) R17.2 ; v2(2620,3215) R11.2
  Bottom Layer w15: P1.60 v1(2225,2418.31) v1(2225,2449.8) ; P1.58 v1(2225,2449.8) ; P1.56 v1(2225,2481.3) ; P1.54 v1(2225,2512.8) ; P1.52 v1(2225,2544.29) ; P1.50 v1(2225,2575.79) ; P1.48 v1(2225,2607.28) ; P1.46 v1(2225,2638.78) v1(2225,2607.28) ; v1(2225,2449.8) v1(2225,2481.3) ; v1(2225,2481.3) v1(2225,2512.8) ; v1(2225,2512.8) v1(2225,2544.29) ; v1(2225,2544.29) v1(2225,2575.79) ; v1(2225,2575.79) v1(2225,2607.28)
+5V_BOOTSTRAP: D2.K J1.44 P1.44 P23.44 | length 131.1
  Top Layer w15: v1(2225,2670.28) J1.44
  Bottom Layer w15: v1(2225,2670.28) P1.44
+5V_BT_A: D2.A R7.2
+5V_PB_A: D1.A R6.2
+5V_Preboot: C18.1 D1.K J1.25 P1.25 P12.1 P14.1 P16.1 P18.1 P19.1 P20.1 P23.25 U5.8 | length 1180.4
  Top Layer w6: J1.25 v1(2175,2953.74)
  Top Layer w10: P23.25 1546.3,2246.3 1546.3,2303.61 1602.16,2359.47 1616.79,2359.47 1790,2532.69 1790,2700 2043.74,2953.74 J1.25
  Bottom Layer w6: P1.25 v1(2175,2953.74)
+12V: J2.1 J2.3 J2.5 J2.7 J2.9 J2.11 J2.13 J2.15 J2.17 J2.19 J4.1 P2.1 P2.3 P2.5 P2.7 P2.9 P2.11 P2.13 P2.15 P2.17 P2.19 | length 1594.5
  Top Layer w15: J2.19 v1(3525,3048.23) ; J2.17 v1(3525,3079.72) ; J2.15 v1(3525,3111.22) ; J2.13 v1(3525,3142.72) ; J2.11 v1(3525,3174.21) ; J2.9 v1(3525,3205.71) ; J2.7 v1(3525,3237.2) ; J2.5 v1(3525,3268.7) ; J2.3 v1(3525,3300.2) ; J2.1 v1(3525,3331.69)
  Bottom Layer w15: P2.19 v1(3525,3048.23) v1(3525,3079.72) ; P2.17 v1(3525,3079.72) ; P2.15 v1(3525,3111.22) ; P2.13 v1(3525,3142.72) ; P2.11 v1(3525,3174.21) ; P2.9 v1(3525,3205.71) ; P2.7 v1(3525,3237.2) ; P2.5 v1(3525,3268.7) ; P2.3 v1(3525,3300.2) ; P2.1 v1(3525,3331.69) v1(3525,3300.2) ; v1(3525,3079.72) v1(3525,3111.22) ; v1(3525,3111.22) v1(3525,3142.72) ; v1(3525,3142.72) v1(3525,3174.21) ; v1(3525,3174.21) v1(3525,3205.71) ; v1(3525,3205.71) v1(3525,3237.2) ; v1(3525,3237.2) v1(3525,3268.7) ; v1(3525,3268.7) v1(3525,3300.2)
+VBAT: J2.21 J2.23 J2.25 J2.27 J2.29 J2.31 J2.33 J2.35 J2.37 J2.39 J2.41 J2.43 J2.45 J2.47 J2.49 J2.51 J2.53 J2.55 J2.57 J3.1 P2.21 P2.23 P2.25 P2.27 P2.29 P2.31 P2.33 P2.35 P2.37 P2.39 P2.41 P2.43 P2.45 P2.47 P2.49 P2.51 P2.53 P2.55 P2.57 | length 3057.9
  Top Layer w15: J2.57 v1(3525,2449.8) ; J2.55 v1(3525,2481.3) ; J2.53 v1(3525,2512.8) ; J2.51 v1(3525,2544.29) ; J2.49 v1(3525,2575.79) ; J2.47 v1(3525,2607.28) ; J2.45 v1(3525,2638.78) ; J2.43 v1(3525,2670.28) ; J2.41 v1(3525,2701.77) ; J2.39 v1(3525,2733.27) ; J2.37 v1(3525,2764.76) ; J2.35 v1(3525,2796.26) ; J2.33 v1(3525,2827.76) ; J2.31 v1(3525,2859.25) ; J2.29 v1(3525,2890.75) ; J2.27 v1(3525,2922.24) ; J2.25 v1(3525,2953.74) ; J2.23 v1(3525,2985.24) ; J2.21 v1(3525,3016.73)
  Bottom Layer w15: P2.57 v1(3525,2449.8) v1(3525,2481.3) ; P2.55 v1(3525,2481.3) ; P2.53 v1(3525,2512.8) ; P2.51 v1(3525,2544.29) ; P2.49 v1(3525,2575.79) ; P2.47 v1(3525,2607.28) ; P2.45 v1(3525,2638.78) ; P2.43 v1(3525,2670.28) ; P2.41 v1(3525,2701.77) ; P2.39 v1(3525,2733.27) ; P2.37 v1(3525,2764.76) ; P2.35 v1(3525,2796.26) ; P2.33 v1(3525,2827.76) ; P2.31 v1(3525,2859.25) ; P2.29 v1(3525,2890.75) ; P2.27 v1(3525,2922.24) ; P2.25 v1(3525,2953.74) ; P2.23 v1(3525,2985.24) ; P2.21 v1(3525,3016.73) v1(3525,2985.24) ; v1(3525,2481.3) v1(3525,2512.8) ; v1(3525,2512.8) v1(3525,2544.29) ; v1(3525,2544.29) v1(3525,2575.79) ; v1(3525,2575.79) v1(3525,2607.28) ; v1(3525,2607.28) v1(3525,2638.78) ; v1(3525,2638.78) v1(3525,2670.28) ; v1(3525,2670.28) v1(3525,2701.77) ; v1(3525,2701.77) v1(3525,2733.27) ; v1(3525,2733.27) v1(3525,2764.76) ; v1(3525,2764.76) v1(3525,2796.26) ; v1(3525,2796.26) v1(3525,2827.76) ; v1(3525,2827.76) v1(3525,2859.25) ; v1(3525,2859.25) v1(3525,2890.75) ; v1(3525,2890.75) v1(3525,2922.24) ; v1(3525,2922.24) v1(3525,2953.74) ; v1(3525,2953.74) v1(3525,2985.24)
+VBAT_Preboot: J2.59 P2.59 | length 131.1
  Top Layer w15: J2.59 v1(3525,2418.31)
  Bottom Layer w15: P2.59 v1(3525,2418.31)
CAN0_BIAS: C12.1 R1.1 R11.1 R12.2 R13.2 | length 262.2
  Top Layer w7: R1.1 2639.49,3350 ; R13.2 2639.49,3350 ; v2(2655,3350) 2639.49,3350
  Bottom Layer w7: R11.1 2651.56,3339.56 2651.56,3346.56 v2(2655,3350) ; R12.2 2651.56,3360.44 2651.56,3353.44 v2(2655,3350) ; C12.1 2675,3370 v2(2655,3350)
CAN0_N: J1.4 P1.4 P8.2 R13.1 R14.1 U3.6 | length 875.2
  Top Layer w5.5: v1(2225,3299.95) 2228.22,3299.95 2237.97,3290.2 2247.09,3290.2 2257.09,3300.2 J1.4 2331.89,3300.2 2341.89,3290.2 2346.76,3290.2 2412.31,3355.75 2516.78,3355.75 2520,3358.97 P8.2 2569.49,3400 R13.1 2671.02,3379.49 R14.1 2718.74,3355.75 2850.75,3355.75 2870,3375 U3.6
  Bottom Layer w5.5: v1(2225,3299.95) 2228.22,3299.95 2237.97,3290.2 2247.09,3290.2 2257.09,3300.2 P1.4
CAN0_P: J1.6 P1.6 P8.1 R1.2 R10.2 U3.7 | length 875.2
  Top Layer w5.5: v1(2225,3268.95) 2228.22,3268.95 2237.97,3278.7 2247.09,3278.7 2257.09,3268.7 J1.6 2331.89,3268.7 2341.89,3278.7 2351.52,3278.7 2417.08,3344.25 2516.78,3344.25 2520,3341.03 P8.1 2569.49,3300 R1.2 2671.02,3320.51 R10.2 2718.74,3344.25 2850.75,3344.25 2870,3325 U3.7
  Bottom Layer w5.5: v1(2225,3268.95) 2228.22,3268.95 2237.97,3278.7 2247.09,3278.7 2257.09,3268.7 P1.6
CAN0_RX: P24.34 U1.38 U3.4
CAN0_STBY: P24.26 U1.41 U3.8
CAN0_TX: P24.33 U1.37 U3.1
CAN1_BIAS: C15.1 R15.1 R17.1 R18.2 R19.2 | length 262.2
  Top Layer w7: R15.1 2639.49,3030 ; R19.2 2639.49,3030 ; v2(2655,3030) 2639.49,3030
  Bottom Layer w7: R17.1 2651.56,3019.56 2651.56,3026.56 v2(2655,3030) ; R18.2 2651.56,3040.44 2651.56,3033.44 v2(2655,3030) ; C15.1 2675,3050 v2(2655,3030)
CAN1_N: J1.10 P1.10 P10.2 R19.1 R20.1 U4.6 | length 954.7
  Top Layer w5.5: v1(2225,3205.46) 2228.22,3205.46 2237.97,3195.71 2247.09,3195.71 2257.09,3205.71 J1.10 2331.89,3205.71 2341.89,3195.71 2359.05,3195.71 2400,3154.76 2400,3085.75 2450,3035.75 2516.78,3035.75 2520,3038.97 P10.2 2569.49,3080 R19.1 2671.02,3059.49 R20.1 2718.74,3035.75 2850.75,3035.75 2870,3055 U4.6
  Bottom Layer w5.5: v1(2225,3205.46) 2228.22,3205.46 2237.97,3195.71 2247.09,3195.71 2257.09,3205.71 P1.10
CAN1_P: J1.12 P1.12 P10.1 R15.2 R16.2 U4.7 | length 954.7
  Top Layer w5.5: v1(2225,3174.46) 2228.22,3174.46 2237.97,3184.21 2247.09,3184.21 2257.09,3174.21 J1.12 2331.89,3174.21 2341.89,3184.21 2354.29,3184.21 2388.5,3150 2388.5,3080.99 2445.24,3024.25 2516.78,3024.25 2520,3021.03 P10.1 2569.49,2980 R15.2 2671.02,3000.51 R16.2 2718.74,3024.25 2850.75,3024.25 2870,3005 U4.7
  Bottom Layer w5.5: v1(2225,3174.46) 2228.22,3174.46 2237.97,3184.21 2247.09,3184.21 2257.09,3174.21 P1.12
CAN1_RX: P24.32 U1.20 U4.4
CAN1_STBY: P24.25 U1.39 U4.8
CAN1_TX: P24.31 U1.19 U4.1
CTRL_SYNC: J1.26 P1.26 P23.26 U1.1 | length 2434.5
  Top Layer w6: v2(1680,1870) v2(2320,1870) ; v1(2225,2953.74) J1.26
  Bottom Layer w6: P23.26 1651.69,2200 1680,2171.69 v2(1680,1870) ; v1(2225,2953.74) P1.26 2346.26,2953.74 2486,2814 2486,2067.7 2320,1901.7 v2(2320,1870)
DEBUG_RX: P4.4 P24.15 U1.26
DEBUG_TX: P4.3 P24.14 U1.25
DETECT_A: J1.32 P23.32 R33.2 U1.21 | length 1753.4
  Top Layer w6: P23.32 v2(2293,1900)
  Bottom Layer w6: v2(2293,1900) 2293,2003 2444,2154 2444,2766 2350.75,2859.25
DETECT_B: P1.32 R31.2 U1.22
DRAIN: J1.1 J1.2 J1.8 J1.14 J1.20 J1.24 J1.27 J1.28 J1.39 J1.40 P1.1 P1.2 P1.8 P1.14 P1.20 P1.24 P1.27 P1.28 P1.39 P1.40 P23.1 P23.2 P23.8 P23.14 P23.20 P23.24 P23.27 P23.28 P23.39 P23.40 | length 1380.5
  Top Layer w6: J1.39 v1(2175,2733.27) ; J1.27 v1(2175,2922.24) ; v1(2225,2733.27) J1.40 ; v1(2225,2922.24) J1.28 ; v1(2225,2985.24) J1.24 ; v1(2225,3048.23) J1.20 ; v1(2225,3142.72) J1.14 ; v1(2225,3237.2) J1.8 ; v1(2225,3331.69) J1.2 ; J1.1 v1(2175,3331.69) J1.1
  Bottom Layer w6: P1.39 v1(2175,2733.27) ; P1.27 v1(2175,2922.24) ; P1.1 v1(2175,3331.69) ; v1(2225,2733.27) P1.40 ; v1(2225,2922.24) P1.28 ; v1(2225,2985.24) P1.24 ; v1(2225,3048.23) P1.20 ; v1(2225,3142.72) P1.14 ; v1(2225,3237.2) P1.8 ; v1(2225,3331.69) P1.2
EN_0: J1.34 P1.34 P23.34 R21.2 R22.2 | length 1988.6
  Top Layer w6: P23.34 1610,1790 v2(2271.5,1790) ; v1(2225,2827.76) J1.34
  Bottom Layer w6: v1(2225,2827.76) P1.34 2328.98,2827.76 2423,2733.74 2423,2173 2271.5,2021.5 v2(2271.5,1790)
EN_1: J1.36 P1.36 P23.36 R24.2 R25.2 | length 2001.2
  Top Layer w6: P23.36 1914.93,1700 1934.93,1720 v2(2250,1720) ; v1(2225,2796.26) J1.36
  Bottom Layer w6: v1(2225,2796.26) P1.36 2328.98,2796.26 2402,2723.24 2402,2192 2250,2040 v2(2250,1720)
EN_2: J1.38 P1.38 P23.38 R27.2 R28.2 | length 2006.9
  Top Layer w6: P23.38 1660,1660 v2(2212.47,1660) ; v1(2225,2764.76) J1.38
  Bottom Layer w6: v2(2212.47,1660) 2212.47,2040.91 2381,2209.44 2381,2712.75 2328.98,2764.76 P1.38 v1(2225,2764.76)
GND: C1.1 C2.1 C3.1 C4.1 C5.1 C6.1 C7.1 C8.1 C9.1 C10.1 C11.1 C12.2 C13.2 C14.2 C15.2 C16.2 C17.2 C18.2 J1.43 J1.45 J1.47 J1.49 J1.51 J1.53 J1.55 J1.57 J1.59 J2.2 J2.4 J2.6 J2.8 J2.10 J2.12 J2.14 J2.16 J2.18 J2.20 J2.22 J2.24 J2.26 J2.28 J2.30 J2.32 J2.34 J2.36 J2.38 J2.40 J2.42 J2.44 J2.46 J2.48 J2.50 J2.52 J2.54 J2.56 J2.58 J2.60 J6.1 P1.43 P1.45 P1.47 P1.49 P1.51 P1.53 P1.55 P1.57 P1.59 P2.2 P2.4 P2.6 P2.8 P2.10 P2.12 P2.14 P2.16 P2.18 P2.20 P2.22 P2.24 P2.26 P2.28 P2.30 P2.32 P2.34 P2.36 P2.38 P2.40 P2.42 P2.44 P2.46 P2.48 P2.50 P2.52 P2.54 P2.56 P2.58 P2.60 P3.3 P3.5 P3.9 P4.2 P18.2 P19.2 P20.2 P22.1 P23.43 P23.45 P23.47 P24.24 P24.36 R9.1 R12.1 R18.1 R22.1 R23.1 R25.1 R26.1 R28.1 R29.1 R30.1 U1.5 U1.18 U1.35 U1.42 U2.2 U2.5 U3.2 U4.2 U5.4 X1.2 | length 6466.3
  Top Layer w15: J1.59 v1(2175,2418.31) ; J1.57 v1(2175,2449.8) ; J1.55 v1(2175,2481.3) ; J1.53 v1(2175,2512.8) ; J1.51 v1(2175,2544.29) ; J1.49 v1(2175,2575.79) ; J1.47 v1(2175,2607.28) ; J1.45 v1(2175,2638.78) ; J1.43 v1(2175,2670.28) ; v1(3575,2418.31) J2.60 ; v1(3575,2449.8) J2.58 ; v1(3575,2481.3) J2.56 ; v1(3575,2512.8) J2.54 ; v1(3575,2544.29) J2.52 ; v1(3575,2575.79) J2.50 ; v1(3575,2607.28) J2.48 ; v1(3575,2638.78) J2.46 ; v1(3575,2670.28) J2.44 ; v1(3575,2701.77) J2.42 ; v1(3575,2733.27) J2.40 ; v1(3575,2764.76) J2.38 ; v1(3575,2796.26) J2.36 ; v1(3575,2827.76) J2.34 ; v1(3575,2859.25) J2.32 ; v1(3575,2890.75) J2.30 ; v1(3575,2922.24) J2.28 ; v1(3575,2953.74) J2.26 ; v1(3575,2985.24) J2.24 ; v1(3575,3016.73) J2.22 ; v1(3575,3048.23) J2.20 ; v1(3575,3079.72) J2.18 ; v1(3575,3111.22) J2.16 ; v1(3575,3142.72) J2.14 ; v1(3575,3174.21) J2.12 ; v1(3575,3205.71) J2.10 ; v1(3575,3237.2) J2.8 ; v1(3575,3268.7) J2.6 ; v1(3575,3300.2) J2.4 ; v1(3575,3331.69) J2.2
  Bottom Layer w10: R18.1 v2(2620,3165) ; R12.1 v2(2620,3485) ; C15.2 v2(2675,3165) ; C12.2 v2(2675,3485)
  Bottom Layer w15: P1.59 v1(2175,2418.31) v1(2175,2449.8) ; P1.57 v1(2175,2449.8) ; P1.55 v1(2175,2481.3) ; P1.53 v1(2175,2512.8) ; P1.51 v1(2175,2544.29) ; P1.49 v1(2175,2575.79) ; P1.47 v1(2175,2607.28) ; P1.45 v1(2175,2638.78) ; P1.43 v1(2175,2670.28) v1(2175,2638.78) ; P2.60 v1(3575,2418.31) v1(3575,2449.8) ; P2.58 v1(3575,2449.8) ; P2.56 v1(3575,2481.3) ; P2.54 v1(3575,2512.8) ; P2.52 v1(3575,2544.29) ; P2.50 v1(3575,2575.79) ; P2.48 v1(3575,2607.28) ; P2.46 v1(3575,2638.78) ; P2.44 v1(3575,2670.28) ; P2.42 v1(3575,2701.77) ; P2.40 v1(3575,2733.27) ; P2.38 v1(3575,2764.76) ; P2.36 v1(3575,2796.26) ; P2.34 v1(3575,2827.76) ; P2.32 v1(3575,2859.25) ; P2.30 v1(3575,2890.75) ; P2.28 v1(3575,2922.24) ; P2.26 v1(3575,2953.74) ; P2.24 v1(3575,2985.24) ; P2.22 v1(3575,3016.73) ; P2.20 v1(3575,3048.23) ; P2.18 v1(3575,3079.72) ; P2.16 v1(3575,3111.22) ; P2.14 v1(3575,3142.72) ; P2.12 v1(3575,3174.21) ; P2.10 v1(3575,3205.71) ; P2.8 v1(3575,3237.2) ; P2.6 v1(3575,3268.7) ; P2.4 v1(3575,3300.2) ; P2.2 v1(3575,3331.69) v1(3575,3300.2) ; v1(2175,2449.8) v1(2175,2481.3) ; v1(2175,2481.3) v1(2175,2512.8) ; v1(2175,2512.8) v1(2175,2544.29) ; v1(2175,2544.29) v1(2175,2575.79) ; v1(2175,2575.79) v1(2175,2607.28) ; v1(2175,2607.28) v1(2175,2638.78) ; v1(3575,2449.8) v1(3575,2481.3) ; v1(3575,2481.3) v1(3575,2512.8) ; v1(3575,2512.8) v1(3575,2544.29) ; v1(3575,2544.29) v1(3575,2575.79) ; v1(3575,2575.79) v1(3575,2607.28) ; v1(3575,2607.28) v1(3575,2638.78) ; v1(3575,2638.78) v1(3575,2670.28) ; v1(3575,2670.28) v1(3575,2701.77) ; v1(3575,2701.77) v1(3575,2733.27) ; v1(3575,2733.27) v1(3575,2764.76) ; v1(3575,2764.76) v1(3575,2796.26) ; v1(3575,2796.26) v1(3575,2827.76) ; v1(3575,2827.76) v1(3575,2859.25) ; v1(3575,2859.25) v1(3575,2890.75) ; v1(3575,2890.75) v1(3575,2922.24) ; v1(3575,2922.24) v1(3575,2953.74) ; v1(3575,2953.74) v1(3575,2985.24) ; v1(3575,2985.24) v1(3575,3016.73) ; v1(3575,3016.73) v1(3575,3048.23) ; v1(3575,3048.23) v1(3575,3079.72) ; v1(3575,3079.72) v1(3575,3111.22) ; v1(3575,3111.22) v1(3575,3142.72) ; v1(3575,3142.72) v1(3575,3174.21) ; v1(3575,3174.21) v1(3575,3205.71) ; v1(3575,3205.71) v1(3575,3237.2) ; v1(3575,3237.2) v1(3575,3268.7) ; v1(3575,3268.7) v1(3575,3300.2)
I2C_SCL: J1.18 P1.18 P23.18 | length 3067.8
  Top Layer w6: v2(1750,1840) v2(2390,1840) ; v1(2225,3079.72) J1.18
  Bottom Layer w6: P23.18 1680,2600 1750,2530 v2(1750,1840) ; v1(2225,3079.72) P1.18 2328.98,3079.72 2460.47,2948.24 2460.47,2938.05 2478.05,2920.47 2488.24,2920.47 2528,2880.71 2528,1978 v2(2390,1840)
I2C_SDA: J1.16 P1.16 P23.16 | length 3360.1
  Top Layer w6: v2(1784.21,1744.21) 1785.41,1743 2327,1743 v2(2330,1740) ; v1(2225,3111.22) J1.16
  Bottom Layer w6: P23.16 1680,2700 1784.21,2595.79 v2(1784.21,1744.21) ; v1(2225,3111.22) P1.16 2328.98,3111.22 2481.47,2958.73 2481.47,2946.74 2486.74,2941.47 2498.73,2941.47 2549,2891.2 2549,1959 v2(2330,1740)
NetC11_2: C11.2 R8.2 R9.2 U2.6
NetD4_A: D4.A R32.2
NetP5_2: P5.2 R6.1
NetP6_2: P6.2 R7.1
NetP7_2: P7.2 R8.1
NetP9_1: P9.1 R10.1 | length 106.8
  Top Layer w7: R10.1 2744.49,3259.49 P9.1
NetP9_2: P9.2 R14.2 | length 106.8
  Top Layer w7: R14.2 2744.49,3440.51 P9.2
NetP11_1: P11.1 R16.1 | length 106.8
  Top Layer w7: R16.1 2744.49,2939.49 P11.1
NetP11_2: P11.2 R20.2 | length 106.8
  Top Layer w7: R20.2 2744.49,3120.51 P11.2
NetP12_2: P12.2 R21.1
NetP12_3: P12.3 P13.2
NetP13_1: P13.1 P18.3 R23.2 U5.1
NetP13_3: P13.3 U5.7
NetP14_2: P14.2 R24.1
NetP14_3: P14.3 P15.2
NetP15_1: P15.1 P19.3 R26.2 U5.3
NetP15_3: P15.3 U5.5
NetP16_2: P16.2 R27.1
NetP16_3: P16.3 P17.2
NetP17_1: P17.1 P20.3 R29.2 U5.6
NetP17_3: P17.3 U5.2
NetP21_2: P21.2 R32.1
NetP22_2: P22.2 R31.1 R33.1
NetR3_1: R3.1 X1.3
NetR4_1: R4.1 X1.1
P_GOOD: D4.K J1.30 P1.30 P7.1 P23.30 R30.2 | length 1944.2
  Top Layer w6: P23.30 1606.36,1993.64 2336.36,1993.64 v2(2340,1990) ; v1(2225,2890.75) J1.30
  Bottom Layer w6: v1(2225,2890.75) P1.30 2297.11,2880.25 2369.75,2880.25 2465,2785 2465,2115 v2(2340,1990)
PA01: P24.1 U1.2
PA02: P24.2 U1.3
PA03: P24.3 U1.4
PA04: P24.4 U1.9
PA05: P24.5 U1.10
PA06: P24.6 U1.11
PA07: P24.7 U1.12
PA08: P24.8 U1.13
PA09: P24.9 U1.14
PA10: P24.10 U1.15
PA11: P24.11 U1.16
PA12: P24.12
PA13: P24.13
PA18: P24.16 U1.27
PA19: P24.17 U1.28
PA20: P24.18 U1.29
PA21: P24.19 U1.30
PA22: P24.20 U1.31
PA23: P24.21 U1.32
PA24: P24.22 U1.33
PA25: P24.23 U1.34
PB02: P24.27 U1.47
PB03: P24.28 U1.48
PB08: P24.29 U1.7
PB09: P24.30 U1.8
PPS: J1.22 P1.22 P23.22 | length 2607.5
  Top Layer w6: v2(1710,1950) 1711.79,1948.21 2418.21,1948.21 v2(2420,1946.43) ; v1(2225,3016.73) J1.22
  Bottom Layer w6: P23.22 1680,2400 1710,2370 v2(1710,1950) ; v1(2225,3016.73) P1.22 2328.98,3016.73 2507,2838.72 2507,2037 2420,1950 v2(2420,1946.43)
QSPI_CLK: J1.29 P1.29 P23.29 | length 1500
  Top Layer w6: P23.29 1540,2040 v2(1818.5,2040)
  Bottom Layer w6: v2(1818.5,2040) 1818.5,2818.5 1890.75,2890.75 P1.29 v1(2175,2890.75)
QSPI_IO0: J1.31 P1.31 P23.31 | length 1658.8
  Top Layer w6: P23.31 1538.53,1938.53 1680.36,1938.53 1697.39,1921.5 v2(1840,1921.5) ; J1.31 v1(2175,2859.25)
  Bottom Layer w6: v2(1840,1921.5) 1840,2780 1919.25,2859.25 P1.31 v1(2175,2859.25)
QSPI_IO1: J1.33 P1.33 P23.33 | length 1754.1
  Top Layer w6: P23.33 1545.51,1800 1584.04,1838.53 1715.94,1838.53 1742.96,1811.5 v2(1870,1811.5) ; J1.33 v1(2175,2827.76)
  Bottom Layer w6: v2(1870,1811.5) 1870,2770 1927.76,2827.76 P1.33 v1(2175,2827.76)
QSPI_IO2: J1.35 P1.35 P23.35 | length 1815.2
  Top Layer w6: P23.35 1538.53,1738.53 1714.14,1738.53 1731.17,1721.5 v2(1900,1721.5) ; J1.35 v1(2175,2796.26)
  Bottom Layer w6: v2(1900,1721.5) 1900,2750 1946.26,2796.26 P1.35 v1(2175,2796.26)
QSPI_IO3: J1.37 P1.37 P23.37 | length 1856.2
  Top Layer w6: P23.37 1561.47,1661.47 1625.63,1661.47 1643.16,1679 1926.99,1679 1937.99,1690 v2(1940,1690) ; J1.37 v1(2175,2764.76)
  Bottom Layer w6: v2(1940,1690) 1940,1740 1930,1750 1930,2740 1954.76,2764.76 P1.37 v1(2175,2764.76)
RESET: P3.10 R5.1 U1.40
RFU_3: J1.3 P1.3 P23.3 | length 768.4
  Top Layer w6: P23.3 1538.53,3338.53 1803.49,3338.53 1841.82,3300.2 J1.3 v1(2175,3300.2)
  Bottom Layer w6: P1.3 v1(2175,3300.2)
RFU_5: J1.5 P1.5 P23.5 | length 765.1
  Top Layer w6: P23.5 1539.43,3239.43 1593.91,3239.43 1623.19,3268.7 J1.5 v1(2175,3268.7)
  Bottom Layer w6: P1.5 v1(2175,3268.7)
RFU_7: J1.7 P1.7 P23.7 | length 793.4
  Top Layer w6: P23.7 1545.51,3100 1606.99,3161.47 1681.47,3161.47 1750.36,3230.36 2098.67,3230.36 J1.7 v1(2175,3237.2)
  Bottom Layer w6: P1.7 v1(2175,3237.2)
RFU_9: J1.9 P1.9 P23.9 | length 821.8
  Top Layer w6: P23.9 1561.47,3061.47 1636.47,3061.47 1780.71,3205.71 J1.9 v1(2175,3205.71)
  Bottom Layer w6: P1.9 v1(2175,3205.71)
RFU_11: J1.11 P1.11 P23.11 | length 882.1
  Top Layer w6: P23.11 1547.1,2947.1 1547.1,3001.58 1586.51,3041 1706,3041 1832.37,3167.37 2098.67,3167.37 J1.11 v1(2175,3174.21)
  Bottom Layer w6: P1.11 v1(2175,3174.21)
RFU_13: J1.13 P1.13 P23.13 | length 910.5
  Top Layer w6: P23.13 1547.1,2847.1 1547.1,2901.58 1606.99,2961.47 1691.47,2961.47 1865.87,3135.87 2098.67,3135.87 J1.13 v1(2175,3142.72)
  Bottom Layer w6: P1.13 v1(2175,3142.72)
RFU_15: J1.15 P1.15 P23.15 | length 938.9
  Top Layer w6: P23.15 1547.1,2747.1 1547.1,2801.58 1606.99,2861.47 1654.47,2861.47 1897.38,3104.38 2098.67,3104.38 J1.15 v1(2175,3111.22)
  Bottom Layer w6: P1.15 v1(2175,3111.22)
RFU_17: J1.17 P1.17 P23.17 | length 967.2
  Top Layer w6: P23.17 1547.1,2647.1 1547.1,2701.58 1606.99,2761.47 1621.47,2761.47 1939.72,3079.72 J1.17 v1(2175,3079.72)
  Bottom Layer w6: P1.17 v1(2175,3079.72)
RFU_19: J1.19 P1.19 P23.19 | length 1036.6
  Top Layer w6: P23.19 1547.1,2547.1 1547.1,2601.58 1606.99,2661.47 1631.47,2661.47 1670,2700 1670,2770 1948.23,3048.23 J1.19 v1(2175,3048.23)
  Bottom Layer w6: P1.19 v1(2175,3048.23)
RFU_21: J1.21 P1.21 P23.21 | length 1085.2
  Top Layer w6: P23.21 1547.1,2447.1 1547.1,2501.58 1606.99,2561.47 1615.96,2561.47 1710,2655.51 1710,2760 1959.89,3009.89 2098.67,3009.89 J1.21 v1(2175,3016.73)
  Bottom Layer w6: P1.21 v1(2175,3016.73)
RFU_23: J1.23 P1.23 P23.23 | length 1131.1
  Top Layer w6: P23.23 1547.1,2347.1 1547.1,2401.58 1606.99,2461.47 1615.96,2461.47 1740,2585.51 1740,2720 1998.39,2978.39 2098.67,2978.39 J1.23 v1(2175,2985.24)
  Bottom Layer w6: P1.23 v1(2175,2985.24)
SWCLK: P3.4 R2.1 U1.45
SWDIO: P3.2 U1.46
SYNC_0: J1.41 P1.41 P23.41 | length 1956.3
  Top Layer w6: P23.41 1550,1450 1550,1520 1590,1560 1635,1560 1705,1630 v2(1950,1630) ; J1.41 v1(2175,2701.77)
  Bottom Layer w6: v2(1950,1630) 1970,1650 1970,1753.47 1950,1773.47 1950,2680 1971.77,2701.77 P1.41 v1(2175,2701.77)
VDDCORE: C7.2 C8.2 U1.43
XTAL: R3.2 U1.23
pads on no net: J1.M1 J1.M2 J2.M1 J2.M2 P1.M2 P2.M2 P3.6 P3.7 P3.8 P5.3 P6.3 P21.3 P22.3 P23.4 P23.6 P23.10 P23.12 U1.24 U2.4
copper on no net: | length 69.5